# EAGLE board Galaksija keyboard matrix (EAGLE 9.6.2)
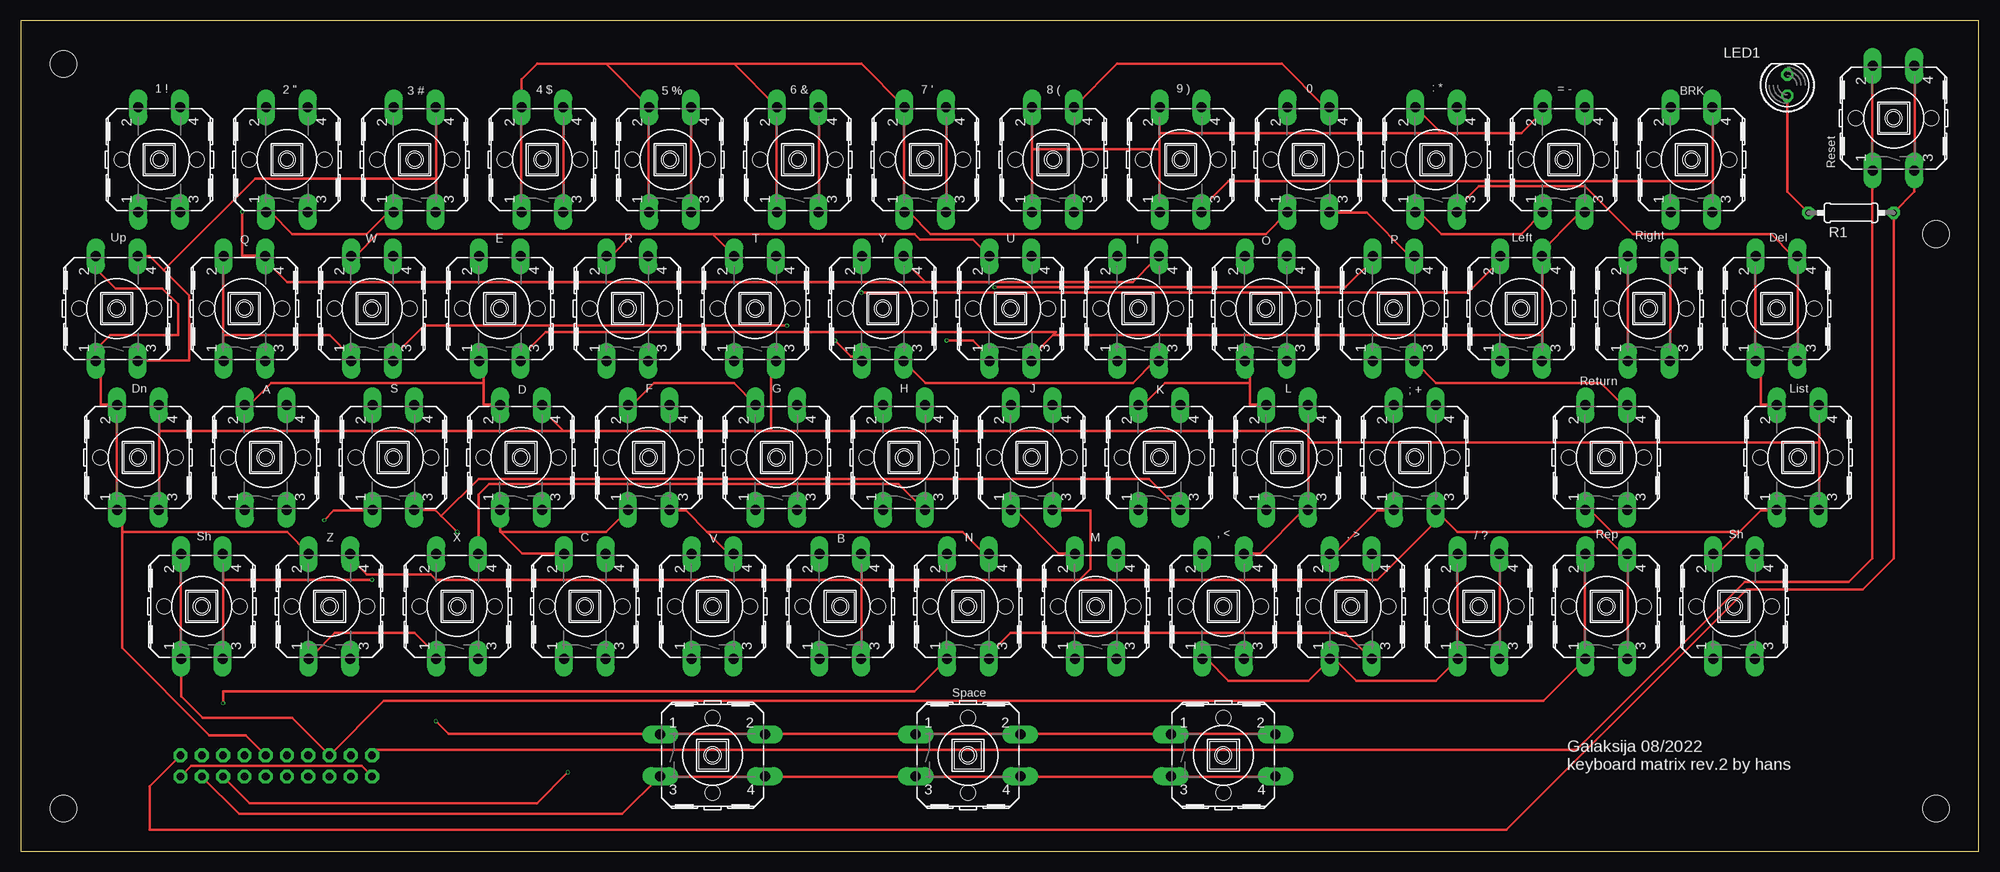
[diagram p0: board, top side]
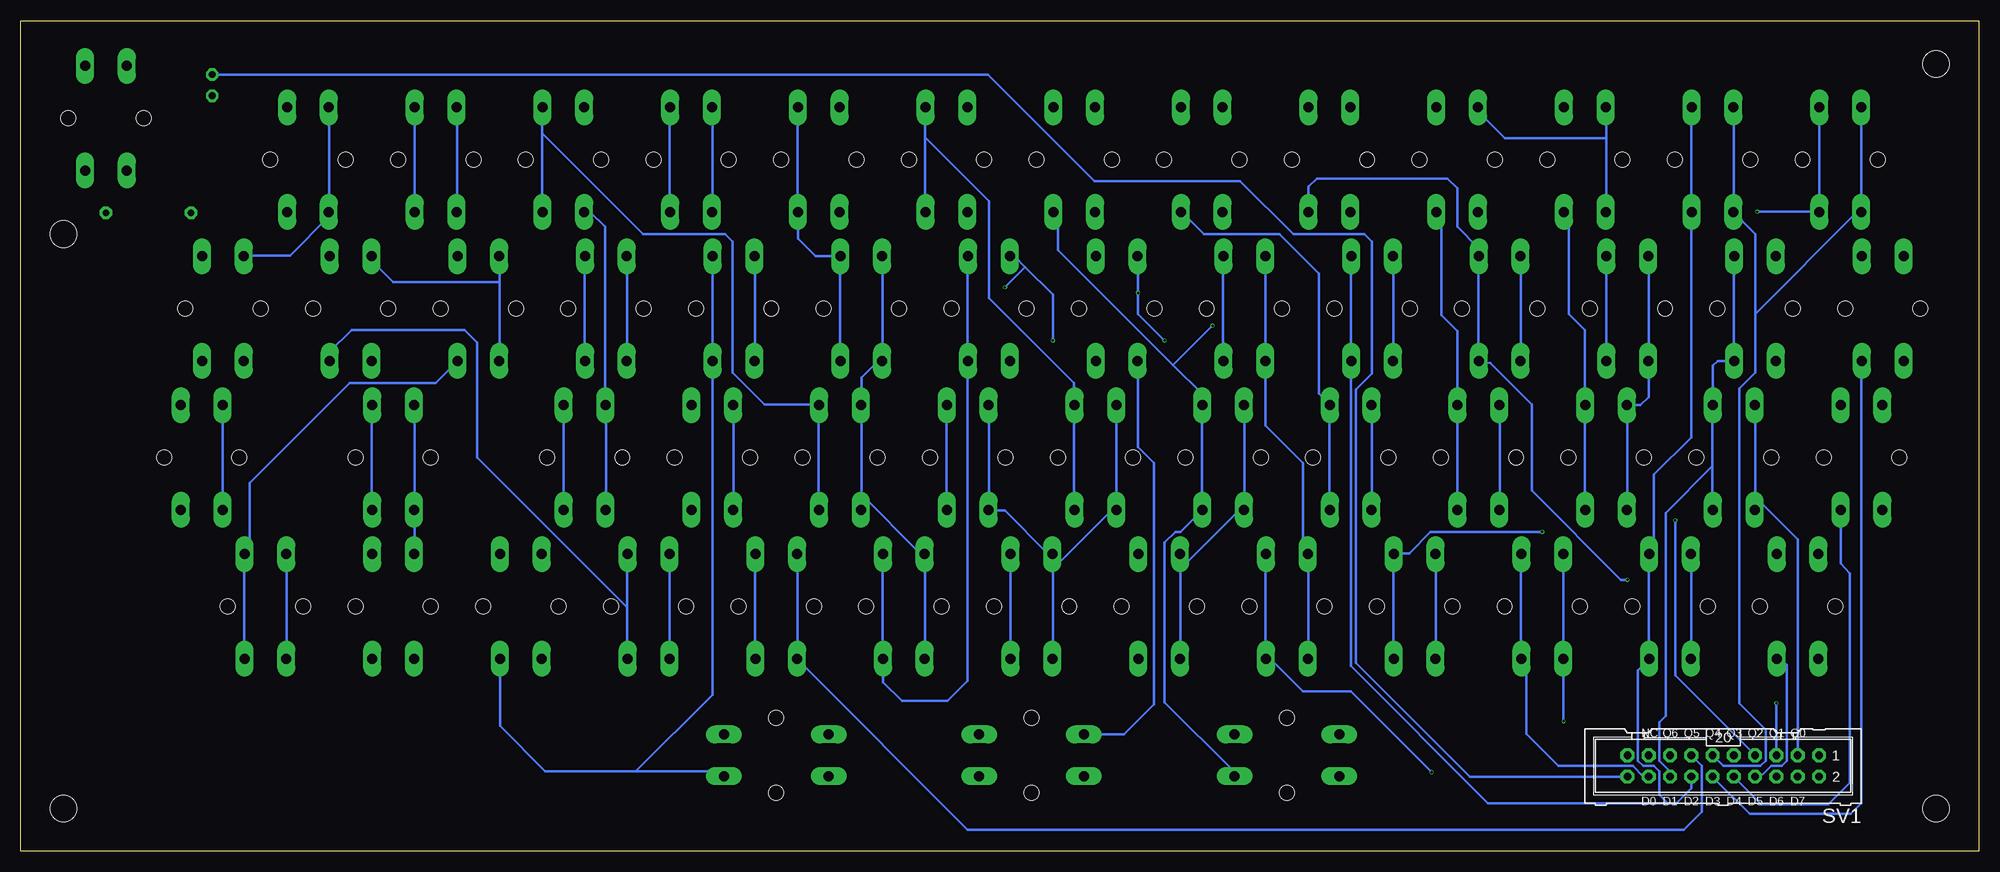
[diagram p1: board, bottom side, seen from below]

Size 233.66 x 99.11 mm. Coordinates in mm from the lower left corner, seen from the top.
Outline: 0,0 233.66,0 233.66,99.11 0,99.11 0,0
Copper layers (1*16): Top 0.035mm / dielectric 1.6mm / Bottom 0.035mm
Design rules "jlcpcb-2layers *": minimum track width 12mil, minimum drill 0.3mm, track to track 8mil, track to pad 8mil, pad to pad 8mil, via to via 8mil, smd to smd 5mil, copper to edge 0.2mm, drill to drill 8mil, minimum pad ring 10mil, minimum via ring 3mil, stop-mask expansion 4mil, vias tented up to drill 0mil, thermal gap 10mil
Holes 3.2 mm at 228.6,73.66 5.08,93.98 5.08,5.08 228.6,5.08

## Footprints (pad centres in the part's own frame; a part is rotated, then mirrored left to right if it is on the bottom)
LED5MM = drill 0.813 octagon: A -1.27,0; K 1.27,0
0207/10 = drill 0.813 octagon: 1 -5.08,0; 2 5.08,0
B3F-40XX = drill 1.194 long: 1 -6.248,2.489; 2 6.248,2.489; 3 -6.248,-2.489; 4 6.248,-2.489 | hole 1.803: 0,-4.496; 0,4.496
ML20 = drill 0.914 octagon: 1 -11.43,-1.27; 2 -11.43,1.27; 3 -8.89,-1.27; 4 -8.89,1.27; 5 -6.35,-1.27; 6 -6.35,1.27; 7 -3.81,-1.27; 8 -3.81,1.27; 9 -1.27,-1.27; 10 -1.27,1.27; 11 1.27,-1.27; 12 1.27,1.27; 13 3.81,-1.27; 14 3.81,1.27; 15 6.35,-1.27; 16 6.35,1.27; 17 8.89,-1.27; 18 8.89,1.27; 19 11.43,-1.27; 20 11.43,1.27

## Placement (x,y rotation side)
LED1  PWR  [LED5MM]  210.82,91.44 90 top
R1  1k  [0207/10]  218.44,76.2 180 top
S1  Space  [B3F-40XX]  82.55,11.43 0 top
S2  A  [B3F-40XX]  29.21,46.99 90 top
S3  B  [B3F-40XX]  97.79,29.21 90 top
S4  C  [B3F-40XX]  67.31,29.21 90 top
S5  D  [B3F-40XX]  59.69,46.99 90 top
S6  E  [B3F-40XX]  57.15,64.77 90 top
S7  F  [B3F-40XX]  74.93,46.99 90 top
S8  G  [B3F-40XX]  90.17,46.99 90 top
S9  H  [B3F-40XX]  105.41,46.99 90 top
S10  I  [B3F-40XX]  133.35,64.77 90 top
S11  J  [B3F-40XX]  120.65,46.99 90 top
S12  K  [B3F-40XX]  135.89,46.99 90 top
S13  L  [B3F-40XX]  151.13,46.99 90 top
S14  M  [B3F-40XX]  128.27,29.21 90 top
S15  N  [B3F-40XX]  113.03,29.21 90 top
S16  O  [B3F-40XX]  148.59,64.77 90 top
S17  P  [B3F-40XX]  163.83,64.77 90 top
S18  Q  [B3F-40XX]  26.67,64.77 90 top
S19  R  [B3F-40XX]  72.39,64.77 90 top
S20  S  [B3F-40XX]  44.45,46.99 90 top
S21  T  [B3F-40XX]  87.63,64.77 90 top
S22  U  [B3F-40XX]  118.11,64.77 90 top
S23  V  [B3F-40XX]  82.55,29.21 90 top
S24  W  [B3F-40XX]  41.91,64.77 90 top
S25  X  [B3F-40XX]  52.07,29.21 90 top
S26  Y  [B3F-40XX]  102.87,64.77 90 top
S27  Z  [B3F-40XX]  36.83,29.21 90 top
S28  Up  [B3F-40XX]  11.43,64.77 90 top
S29  Down  [B3F-40XX]  13.97,46.99 90 top
S30  Left  [B3F-40XX]  179.07,64.77 90 top
S31  Right  [B3F-40XX]  194.31,64.77 90 top
S32  Space  [B3F-40XX]  113.03,11.43 0 top
S33  0  [B3F-40XX]  153.67,82.55 90 top
S34  1  [B3F-40XX]  16.51,82.55 90 top
S35  2  [B3F-40XX]  31.75,82.55 90 top
S36  3  [B3F-40XX]  46.99,82.55 90 top
S37  4  [B3F-40XX]  62.23,82.55 90 top
S38  5  [B3F-40XX]  77.47,82.55 90 top
S39  6  [B3F-40XX]  92.71,82.55 90 top
S40  7  [B3F-40XX]  107.95,82.55 90 top
S41  8  [B3F-40XX]  123.19,82.55 90 top
S42  9  [B3F-40XX]  138.43,82.55 90 top
S43  ;  [B3F-40XX]  166.37,46.99 90 top
S44  :  [B3F-40XX]  168.91,82.55 90 top
S45  ,  [B3F-40XX]  143.51,29.21 90 top
S46  =  [B3F-40XX]  184.15,82.55 90 top
S47  .  [B3F-40XX]  158.75,29.21 90 top
S48  /  [B3F-40XX]  173.99,29.21 90 top
S49  Return  [B3F-40XX]  189.23,46.99 90 top
S50  Break  [B3F-40XX]  199.39,82.55 90 top
S51  Repeat  [B3F-40XX]  189.23,29.21 90 top
S52  Delete  [B3F-40XX]  209.55,64.77 90 top
S53  List  [B3F-40XX]  212.09,46.99 90 top
S54  Shift1  [B3F-40XX]  21.59,29.21 90 top
S55  Schift2  [B3F-40XX]  204.47,29.21 90 top
S56  Space  [B3F-40XX]  143.51,11.43 0 top
S57  RST  [B3F-40XX]  223.52,87.5 90 top
SV1  KBD  [ML20]  30.48,10.16 180 bottom

## Library data of the parts
LED1 = led
R1 = rcl; SPICEPREFIX: R
S1-S57 = switch-omron; MF: OMRON COMPONENTS USA; MPN: B3F-4000; OC_FARNELL: 176434; OC_NEWARK: 36K3105
SV1 = con-harting-ml; OC_FARNELL: unknown; OC_NEWARK: unknown

## Nets
D0: S9.3 S9.4 S17.3 S17.4 S25.3 S25.4 S33.3 S33.4 S41.3 S41.4 S49.3 S49.4 SV1.18
D1: S2.3 S2.4 S10.3 S10.4 S18.3 S18.4 S26.3 S26.4 S34.3 S34.4 S42.3 S42.4 S50.3 S50.4 SV1.16
D2: S3.3 S3.4 S11.3 S11.4 S19.3 S19.4 S27.3 S27.4 S35.3 S35.4 S43.3 S43.4 S51.3 S51.4 SV1.14
D3: S4.3 S4.4 S12.3 S12.4 S20.3 S20.4 S28.3 S28.4 S36.3 S36.4 S44.3 S44.4 S52.3 S52.4 SV1.12
D4: S5.3 S5.4 S13.3 S13.4 S21.3 S21.4 S29.3 S29.4 S37.3 S37.4 S45.3 S45.4 S53.3 S53.4 SV1.10
D5: S6.3 S6.4 S14.3 S14.4 S22.3 S22.4 S30.3 S30.4 S38.3 S38.4 S46.3 S46.4 S54.3 S54.4 S55.3 S55.4 SV1.8
D6: S7.3 S7.4 S15.3 S15.4 S23.3 S23.4 S31.3 S31.4 S39.3 S39.4 S47.3 S47.4 SV1.6
D7: S1.3 S1.4 S8.3 S8.4 S16.3 S16.4 S24.3 S24.4 S32.3 S32.4 S40.3 S40.4 S48.3 S48.4 S56.3 S56.4 SV1.4
GND: LED1.K SV1.2 SV1.20
N$1: LED1.A R1.2
Q0: S2.1 S2.2 S3.1 S3.2 S4.1 S4.2 S5.1 S5.2 S6.1 S6.2 S7.1 S7.2 S8.1 S8.2 SV1.3
Q1: S9.1 S9.2 S10.1 S10.2 S11.1 S11.2 S12.1 S12.2 S13.1 S13.2 S14.1 S14.2 S15.1 S15.2 S16.1 S16.2 SV1.5
Q2: S17.1 S17.2 S18.1 S18.2 S19.1 S19.2 S20.1 S20.2 S21.1 S21.2 S22.1 S22.2 S23.1 S23.2 S24.1 S24.2 SV1.7
Q3: S1.1 S1.2 S25.1 S25.2 S26.1 S26.2 S27.1 S27.2 S28.1 S28.2 S29.1 S29.2 S30.1 S30.2 S31.1 S31.2 S32.1 S32.2 S56.1 S56.2 SV1.9
Q4: S33.1 S33.2 S34.1 S34.2 S35.1 S35.2 S36.1 S36.2 S37.1 S37.2 S38.1 S38.2 S39.1 S39.2 S40.1 S40.2 SV1.11
Q5: S41.1 S41.2 S42.1 S42.2 S43.1 S43.2 S44.1 S44.2 S45.1 S45.2 S46.1 S46.2 S47.1 S47.2 S48.1 S48.2 SV1.13
Q6: S49.1 S49.2 S50.1 S50.2 S51.1 S51.2 S52.1 S52.2 S53.1 S53.2 S54.1 S54.2 S55.1 S55.2 SV1.15
RST: S57.1 S57.2 SV1.19
VCC: R1.1 S57.3 S57.4 SV1.1

## Tracks (layer width: path | path; a pad name or v marks a point on that pad's centre or on a via)
D0
  Top 0.305: S17.4 165.74,71.12 160.66,76.2 156.21,76.2 S33.3 | S49.4 191.13,53.34 188.59,55.88 168.91,55.88 166.37,58.42 S17.3 | S25.4 54.61,35.56 54.61,42.55 55.88,43.81 104.78,43.81 107.31,41.27 S9.3 | S33.4 155.57,88.9 150.5,93.98 130.81,93.98 125.73,88.9 S41.4
  Bottom 0.305: S49.3 191.77,41.27 191.77,52.7 S49.4 | S17.3 166.37,59.05 166.37,70.48 S17.4 | S33.3 156.21,76.83 156.21,88.27 S33.4 | SV1.18 40.01,8.89 41.27,10.16 50.16,10.16 53.98,13.97 53.98,22.86 S25.3 54.61,23.5 54.61,34.92 S25.4 | S9.3 107.95,41.27 107.95,52.7 S9.4 107.95,53.34 107.95,55.88 118.11,66.04 118.11,77.6 125.73,85.22 | 125.73,85.22 125.73,88.27 S41.4 | 125.73,85.22 125.73,76.83 S41.3
D1  (via drill 0.3)
  Top 0.305: v26.42,76.33 26.42,71.12 28.57,71.12 S18.4 29.21,70.48 31.75,67.94 107.95,67.94 | S26.3 105.41,58.42 107.95,55.88 132.72,55.88 135.25,58.42 S10.3 | 201.93,80.01 201.93,88.27 S50.4 | 201.93,80.01 201.93,76.83 S50.3 | 107.95,67.94 105.41,70.48 S26.4 | 107.95,67.94 132.72,67.94 135.25,70.48 S10.4 | 201.93,80.01 144.15,80.01 140.97,76.83 S42.3
  Bottom 0.305: S18.4 29.21,70.48 29.21,59.05 S18.3 31.14,58.52 31.7,57.96 S2.4 31.75,52.7 31.75,45.97 | SV1.16 36.83,9.53 38.1,10.79 38.1,15.37 37.34,16.13 37.34,40.39 31.75,45.97 | 31.75,45.97 31.75,41.27 S2.3 | v26.42,76.33 19.02,76.33 S34.3 S34.4 | S42.4 140.97,88.27 140.97,76.83 S42.3 140.92,73.1 138.84,71.02 S10.4 135.89,70.48 135.89,59.05 S10.3
D2
  Top 0.305: S51.3 191.77,23.5 191.77,34.92 S51.4 191.13,35.56 188.59,38.1 171.45,38.1 169.54,40.01 | 169.54,40.01 168.91,40.64 S43.3 169.54,40.01 | 100.33,32.38 100.33,34.92 S3.4 | 100.33,32.38 100.33,23.5 S3.3 | 126.36,32.38 100.33,32.38 | 126.36,32.38 127.64,33.66 127.64,40.64 123.19,40.64 S11.3 | 169.54,40.01 161.93,32.38 126.36,32.38 | 100.33,32.38 49.53,32.38 48.9,33.02 41.27,33.02 39.37,34.92 S27.4
  Bottom 0.305: S35.4 34.29,88.27 34.29,76.83 S35.3 34.29,76.2 34.29,49.4 38.73,44.96 38.73,35.56 S27.4 39.37,34.92 39.37,23.5 S27.3 39.37,22.86 40.64,21.59 40.64,10.79 40.01,10.16 38.73,10.16 38.1,9.53 38.1,6.73 37.08,5.71 | S19.4 74.93,70.48 74.93,59.05 S19.3 74.93,58.42 74.93,22.1 58.55,5.71 37.08,5.71 | SV1.14 34.29,7.49 36.07,5.71 37.08,5.71 | S43.3 168.91,41.27 168.91,52.7 S43.4 | S11.3 123.19,41.27 123.19,52.7 S11.4
D3  (via drill 0.3)
  Top 0.305: S52.3 212.09,59.05 212.09,70.48 S52.4 211.46,71.12 208.91,73.66 192.41,73.66 186.69,79.38 173.99,79.38 171.45,76.83 S44.3 | 17.02,69.34 20.07,66.29 20.07,58.55 13.92,58.55 S28.3 | 17.02,69.34 15.34,71.02 S28.4 | 49.53,80.26 49.53,88.27 S36.4 | 49.53,80.26 49.53,76.83 S36.3 | 50.16,40.01 49.43,40.74 S20.3 | 50.16,40.01 v52.07,38.1 | 17.02,69.34 27.94,80.26 49.53,80.26 | 50.16,40.01 54.61,44.45 134.62,44.45 137.79,41.27 S12.3
  Bottom 0.305: S12.3 138.43,41.27 138.43,52.7 S12.4 138.43,53.34 144.91,53.34 148.72,57.15 148.72,72.77 149.61,73.66 159.38,73.66 171.45,85.72 | 171.45,85.72 171.45,88.27 S44.4 | 171.45,85.72 171.45,76.83 S44.3 | SV1.12 27.3,4.45 15.24,4.45 13.97,5.71 13.97,58.42 S28.3 | S4.3 69.85,23.5 69.85,34.92 S4.4 69.22,35.56 67.94,35.56 65.41,38.1 v52.07,38.1 | S20.3 46.99,41.27 46.99,52.7 S20.4 46.99,53.34 46.99,62.23 48.9,64.14 48.9,76.2 S36.3
D4
  Top 0.305: 214.63,48.77 214.63,52.7 S53.4 | 214.63,48.77 214.63,41.27 S53.3 | S45.4 146.05,35.56 147.96,35.56 153.03,40.64 S13.3 153.67,41.27 153.67,48.77 | 153.67,48.77 153.67,50.16 | 153.67,50.16 153.67,52.7 S13.4 | 153.67,48.77 214.63,48.77 | 16.51,50.16 16.51,41.27 S29.3 | 16.51,50.16 16.51,52.7 S29.4 | S37.3 64.77,76.83 64.77,88.27 S37.4 | 89.53,50.16 89.53,58.42 S21.3 | 64.77,50.16 89.53,50.16 | 64.77,50.16 62.23,52.7 S5.4 | 64.77,50.16 16.51,50.16 | 89.53,50.16 153.67,50.16
  Bottom 0.305: S45.3 146.05,23.5 146.05,34.92 S45.4 | SV1.10 25.91,5.59 17.91,5.59 15.37,8.13 15.37,33.12 16.46,34.33 S29.3 | S21.3 90.17,59.05 90.17,70.48 S21.4 | S5.3 62.23,41.27 62.23,52.7 S5.4 62.23,53.34 62.23,62.1 64.14,64.01 64.14,76.2 S37.3
D5  (via drill 0.3)
  Top 0.305: 24.13,32.38 24.13,23.5 S54.3 | 24.13,32.38 24.13,34.92 S54.4 | S38.3 80.01,76.83 80.01,88.27 S38.4 | v41.91,32.38 24.13,32.38 | 181.61,61.59 181.61,70.48 S30.4 180.97,71.12 186.06,76.2 S46.3 | 181.61,61.59 181.61,59.05 S30.3 | 123.19,61.59 123.57,61.98 62.61,61.98 59.69,59.05 S6.3 | 123.19,61.59 120.65,59.05 S22.3 | 181.61,61.59 123.19,61.59
  Bottom 0.305: SV1.8 26.04,8.89 24.77,10.16 23.5,10.16 22.86,10.79 22.86,22.23 23.5,22.86 S54.3 | S38.3 79.96,79.3 78.99,80.26 63.37,80.26 62.23,79.12 62.23,74.55 59.69,72.01 59.69,71.12 S6.4 59.69,70.48 59.69,59.05 S6.3 58.29,58.29 53.34,53.34 53.34,43.05 42.67,32.38 v41.91,32.38 | S14.4 130.81,34.92 130.81,23.5 S14.3 130.76,20.14 128.52,17.91 123.06,17.91 120.65,20.32 120.65,58.42 S22.3 120.65,59.05 120.65,70.48 S22.4 | S55.3 207.01,23.5 207.01,34.92 S55.4 206.38,35.56 206.38,43.94 194.44,55.88 184.15,55.88 181.61,58.42 S30.3 | S46.4 186.69,88.27 186.69,76.83 S46.3
D6  (via drill 0.3)
  Top 0.305: SV1.6 27.3,5.71 61.59,5.71 v65.28,9.4 | S39.3 95.25,76.83 95.25,88.27 S39.4 | S31.3 196.85,59.05 196.85,70.48 S31.4 | 81.92,38.1 79.38,40.64 77.47,40.64 S7.3 | 81.92,38.1 84.45,35.56 S23.4 | 81.92,38.1 112.39,38.1 114.94,35.56 S15.4 | S47.3 160.66,23.5 158.12,26.04 118.11,26.04 115.57,23.5 S15.3
  Bottom 0.305: v65.28,9.4 74.93,19.05 80.64,19.05 84.45,22.86 S23.3 85.09,23.5 85.09,34.92 S23.4 | 161.29,29.08 161.29,34.92 S47.4 | 161.29,29.08 161.29,23.5 S47.3 | S15.3 115.57,23.5 115.57,34.92 S15.4 | S7.3 77.47,41.27 77.47,52.7 S7.4 77.47,53.34 78.74,54.61 78.74,68.96 83.44,73.66 92.46,73.66 95.08,76.28 S39.3 | S31.3 196.8,59.61 194.18,62.23 180.72,62.23 179.2,60.71 179.2,46.99 161.29,29.08
D7  (via drill 0.3)
  Top 0.305: S40.3 110.49,76.83 110.49,88.27 S40.4 | v91.44,62.74 48.13,62.74 44.45,59.05 S24.3 | S48.3 176.53,23.5 176.53,34.92 S48.4 | S56.4 149.22,8.89 137.79,8.89 S56.3 137.16,8.89 119.38,8.89 S32.4 118.75,8.89 107.31,8.89 S32.3 106.68,8.89 88.9,8.89 S1.4 88.27,8.89 76.83,8.89 S1.3 76.2,8.89 71.75,4.45 26.04,4.45 SV1.4
  Bottom 0.305: S24.3 44.45,59.05 44.45,70.48 S24.4 | 96.14,58.04 109.86,71.75 109.86,76.2 S40.3 | v91.44,62.74 96.14,58.04 | S16.4 151.13,70.48 151.13,59.05 S16.3 151.13,58.42 151.13,18.67 160.27,9.53 | S48.3 176.48,14.94 171.07,9.53 160.27,9.53 | 160.27,9.53 149.86,9.53 S56.4 | S1.4 88.9,9.53 97.16,17.78 97.16,36.83 95.89,38.1 95.25,38.1 92.71,40.64 S8.3 92.71,41.27 92.71,52.7 S8.4 92.66,54.56 96.14,58.04
GND
  Top 0.305: SV1.2 20.32,10.16 40.64,10.16 SV1.20
  Bottom 0.305: LED1.K 118.24,92.71 105.54,80.01 88.14,80.01 81.79,73.66 73.28,73.66 72.39,72.77 72.39,57.02 74.3,55.12 74.3,22.48 60.71,8.89 SV1.20
N$1
  Top 0.305: LED1.A 210.82,78.74 R1.2
Q0
  Top 0.305: 55.24,55.88 55.24,53.34 57.15,53.34 S5.2 | 55.24,55.88 55.24,58.42 S6.1 | 57.28,38.1 59.82,35.56 64.77,35.56 S4.2 | 57.28,38.1 57.2,38.18 S5.1 | 57.28,38.1 69.85,38.1 72.39,40.64 S7.1 | S8.2 87.63,53.34 85.09,55.88 75.56,55.88 73.03,53.34 S7.2 | 55.24,55.88 29.84,55.88 27.3,53.34 S2.2
  Bottom 0.305: SV1.3 21.59,37.21 26.67,42.29 | 26.67,42.29 26.67,41.27 S2.1 | 26.67,42.29 26.67,52.7 S2.2 | 95.25,33.66 95.25,34.92 S3.2 95.25,33.66 | 95.25,33.66 95.25,23.5 S3.1 | 95.25,33.66 88.27,40.64 S8.1 87.63,41.27 87.63,52.7 S8.2 | S6.2 54.61,70.48 54.61,59.05 S6.1 | S7.1 72.39,41.27 72.39,52.7 S7.2 | S4.1 64.77,23.5 64.77,34.92 S4.2 | S5.2 57.15,52.7 57.15,41.27 S5.1
Q1  (via drill 0.3)
  Top 0.305: S11.1 118.75,40.64 123.83,35.56 125.73,35.56 S14.2 | 146.69,55.88 146.69,53.34 148.59,53.34 S13.2 | 146.69,55.88 146.69,58.42 S16.1 | 146.69,55.88 136.53,55.88 133.99,53.34 S12.2 | v24.13,17.65 24.13,19.05 106.68,19.05 110.49,22.86 S15.1
  Bottom 0.305: S14.1 125.73,23.5 125.73,34.92 S14.2 126.36,35.56 133.35,42.55 | S11.2 118.11,52.7 118.11,41.27 S11.1 118.11,40.64 116.2,40.64 111.12,35.56 S15.2 | 133.35,42.55 133.35,52.7 S12.2 133.35,53.34 133.35,56.52 131.44,58.42 S10.1 130.81,59.05 130.81,70.48 S10.2 | 133.35,42.55 133.35,41.27 S12.1 133.35,42.55 | S13.1 148.59,41.27 148.59,52.7 S13.2 | S16.2 146.05,70.48 146.05,59.05 S16.1 | v24.13,17.65 SV1.5 | 110.49,33.66 110.49,23.5 S15.1 | 110.49,33.66 110.49,34.92 S15.2 | 110.49,33.66 103.5,40.64 S9.1 102.87,41.27 102.87,52.7 S9.2 | 110.49,33.66 S15.2
Q2  (via drill 0.3)
  Top 0.305: 24.13,61.59 24.13,70.48 S18.2 | 24.13,61.59 24.13,59.05 S18.1 | 24.13,61.59 36.83,61.59 39.37,59.05 S24.1 | v36.2,39.5 37.34,40.64 41.91,40.64 S20.1 | v110.49,60.96 113.67,60.96 115.57,59.05 S22.1 | v116.2,67.31 158.12,67.31 161.29,70.48 S17.2 | 73.03,73.66 70.48,71.12 S19.2 | 82.55,73.66 73.03,73.66 | 82.55,73.66 85.09,71.12 S21.2 | 82.55,73.66 106.68,73.66 107.31,73.03 113.67,73.03 115.57,71.12 S22.2 | 73.03,73.66 42.55,73.66 40.01,71.12 S24.2
  Bottom 0.305: S24.2 39.37,70.48 39.37,59.05 S24.1 39.37,58.47 39.37,54.23 40.36,53.24 S20.2 41.91,52.7 41.91,41.27 S20.1 | SV1.7 36.2,20.95 v36.2,39.5 | S17.1 161.29,59.05 161.29,70.48 S17.2 | v110.49,60.96 110.49,66.42 113.79,69.72 | S22.2 115.09,71.02 113.79,69.72 | 113.79,69.72 v116.2,67.31 | S23.1 80.01,23.5 80.01,34.92 S23.2 80.64,35.56 80.64,46.35 85.09,50.8 85.09,58.42 S21.1 85.09,59.05 85.09,70.48 S21.2 | S19.1 69.85,59.05 69.85,70.48 S19.2
Q3  (via drill 0.3)
  Top 0.305: S28.2 8.94,69.55 11.3,67.18 16.89,67.18 18.8,65.28 18.8,61.59 10.67,61.59 8.94,59.87 S28.1 9.53,58.42 9.53,53.34 11.43,53.34 S29.2 11.43,52.7 11.43,41.27 S29.1 12.06,40.64 12.06,38.1 | SV1.9 26.8,13.84 22.48,13.84 12.06,24.26 12.06,38.1 | 12.06,38.1 31.75,38.1 34.29,35.56 S27.2 | S25.1 49.53,23.5 46.99,26.04 37.47,26.04 34.92,23.5 S27.1 | S31.1 191.77,59.05 191.77,70.48 S31.2 | S56.2 149.22,13.97 137.79,13.97 S56.1 137.16,13.97 119.38,13.97 S32.2 118.75,13.97 107.31,13.97 S32.1 106.68,13.97 88.9,13.97 S1.2 88.27,13.97 76.83,13.97 S1.1 76.2,13.97 51.05,13.97 v49.53,15.49 | v97.16,60.96 99.06,59.05 100.33,59.05 S26.1 | v100.33,66.67 172.72,66.67 176.53,70.48 S30.2
  Bottom 0.305: S25.2 49.53,34.92 49.53,23.5 S25.1 49.53,22.91 v49.53,15.49 | S27.1 34.29,23.5 34.29,34.92 S27.2 | 176.53,67.94 176.53,70.48 S30.2 | 176.53,67.94 176.53,59.05 S30.1 | 176.53,67.94 189.23,67.94 191.77,70.48 S31.2 | S26.1 100.33,58.42 100.33,48.26 98.42,46.35 98.42,17.53 102.03,13.92 S32.1 | v97.16,60.96 100.33,64.14 v100.33,66.67 100.33,70.48 S26.2
Q4
  Top 0.305: S39.1 90.17,76.83 90.17,88.27 S39.2 90.17,88.9 85.09,93.98 | S38.1 74.93,76.83 74.93,88.27 S38.2 74.93,88.9 69.85,93.98 | S37.1 59.69,76.83 59.69,88.27 S37.2 59.74,92.13 61.59,93.98 69.85,93.98 | 69.85,93.98 85.09,93.98 | 85.09,93.98 100.33,93.98 105.41,88.9 S40.2 105.41,88.27 105.41,76.83 S40.1 106.05,76.2 108.58,73.66 148.59,73.66 151.13,76.2 S33.1 | S35.1 29.84,76.2 32.38,73.66 41.27,73.66 43.81,76.2 44.45,76.2 S36.1
  Bottom 0.305: SV1.11 30.48,10.16 26.04,10.16 25.4,10.79 25.4,14.48 28.57,17.65 28.57,55.24 26.67,57.15 26.67,64.14 | 26.67,64.14 26.67,73.66 29.21,76.2 S35.1 29.21,76.83 29.21,88.27 S35.2 | 26.67,64.14 14.61,76.2 S34.1 S34.2 | S33.1 151.13,76.83 151.13,88.27 S33.2 | 44.45,85.09 44.45,88.27 S36.2 | 44.45,85.09 44.45,76.83 S36.1 | 44.45,85.09 56.52,85.09 59.69,88.27 S37.2
Q5
  Top 0.305: 120.65,83.82 120.65,88.27 S41.2 | 120.65,83.82 120.65,76.83 S41.1 | 135.89,85.72 135.89,88.27 S42.2 | 135.89,85.72 135.89,83.82 | 135.89,83.82 135.89,76.83 S42.1 | 135.89,83.82 120.65,83.82 | S44.1 167,76.2 169.54,73.66 179.07,73.66 181.61,76.2 S46.1 | 169.54,85.72 167,88.27 S44.2 | 169.54,85.72 179.07,85.72 181.61,88.27 S46.2 | 169.54,85.72 135.89,85.72 | S48.2 171.45,34.92 171.45,23.5 S48.1 171.45,22.86 168.91,20.32 159.38,20.32 156.84,22.86 S47.1 156.21,22.86 153.67,20.32 144.15,20.32 141.6,22.86 S45.1 | S47.2 156.84,35.56 161.93,40.64 163.83,40.64 S43.1
  Bottom 0.305: S46.1 181.61,76.83 181.61,88.27 S46.2 | S47.1 156.21,23.5 156.21,34.92 S47.2 | S43.1 163.83,41.27 163.83,52.7 S43.2 163.96,53.25 163.96,74.55 165.71,76.3 S44.1 | SV1.13 33.02,10.16 33.02,4.7 35.18,2.54 120.65,2.54 140.97,22.86 S45.1 140.97,23.5 140.97,34.92 S45.2
Q6
  Top 0.305: S54.2 19.05,34.92 19.05,23.5 S54.1 19.1,18.49 21.72,15.88 32.38,15.88 SV1.15 43.31,17.91 181.74,17.91 186.69,22.86 S51.1 186.69,23.5 186.69,34.92 S51.2 | S53.2 209.55,53.34 207.65,53.34 207.65,58.42 S52.1 207.01,59.05 207.01,70.48 S52.2 | 205.1,38.1 207.65,40.64 209.55,40.64 S53.1 | 205.1,38.1 202.56,35.56 S55.2 | 205.1,38.1 189.87,38.1 187.32,40.64 S49.1
  Bottom 0.305: S51.2 186.69,35.56 186.69,40.64 S49.1 186.69,41.27 186.69,52.7 S49.2 | S50.2 196.85,88.27 196.85,76.83 S50.1 196.9,75.77 201.55,71.12 207.01,71.12 S52.2 | S55.1 201.93,23.5 201.93,34.92 S55.2 | S53.1 209.55,41.27 209.55,52.7 S53.2
RST
  Top 0.305: SV1.19 42.55,12.06 185.67,12.06 205.74,32.13 218.19,32.13 220.98,34.92 220.98,80.64 S57.1 220.98,81.28 220.98,93.34 S57.2
VCC
  Top 0.305: SV1.1 15.37,7.75 15.37,2.54 177.29,2.54 205.99,31.24 219.84,31.24 223.52,34.92 R1.1 223.52,76.22 226.01,78.72 S57.3 226.06,81.28 226.06,93.34 S57.4

## Text on the board
tPlace: 1 ! | 9 ) | 0 | : * | = - | 2 " | 3 # | 4 $ | 5 % | 6 & | 7 ' | 8 ( | BRK | Reset | Up | Q | W | E | R | T | Y | U | I | P | Left | Right | Del | O | Return | Dn | A | S | D | F | G | H | J | K | L | ; + | List | Sh | Z | X | C | V | B | N | M | , < | . > | / ? | Rep | Sh | Space | Galaksija 08/2022 / keyboard matrix rev.2 by hans
bPlace: Q0 | Q1 | Q2 | Q3 | Q4 | Q5 | Q6 | NC | D7 | D6 | D5 | D4 | D3 | D2 | D1 | D0